# Altium PCB USB转CAN.PcbDoc
Units mm, origin at the board's own origin, x right, y up, seen from the top; angles counter-clockwise.
Board outline 52.5 x 25.53 mm, 2 copper layers (Top Layer, Bottom Layer); 32 components, 35 nets, 173 pads, 22 vias.
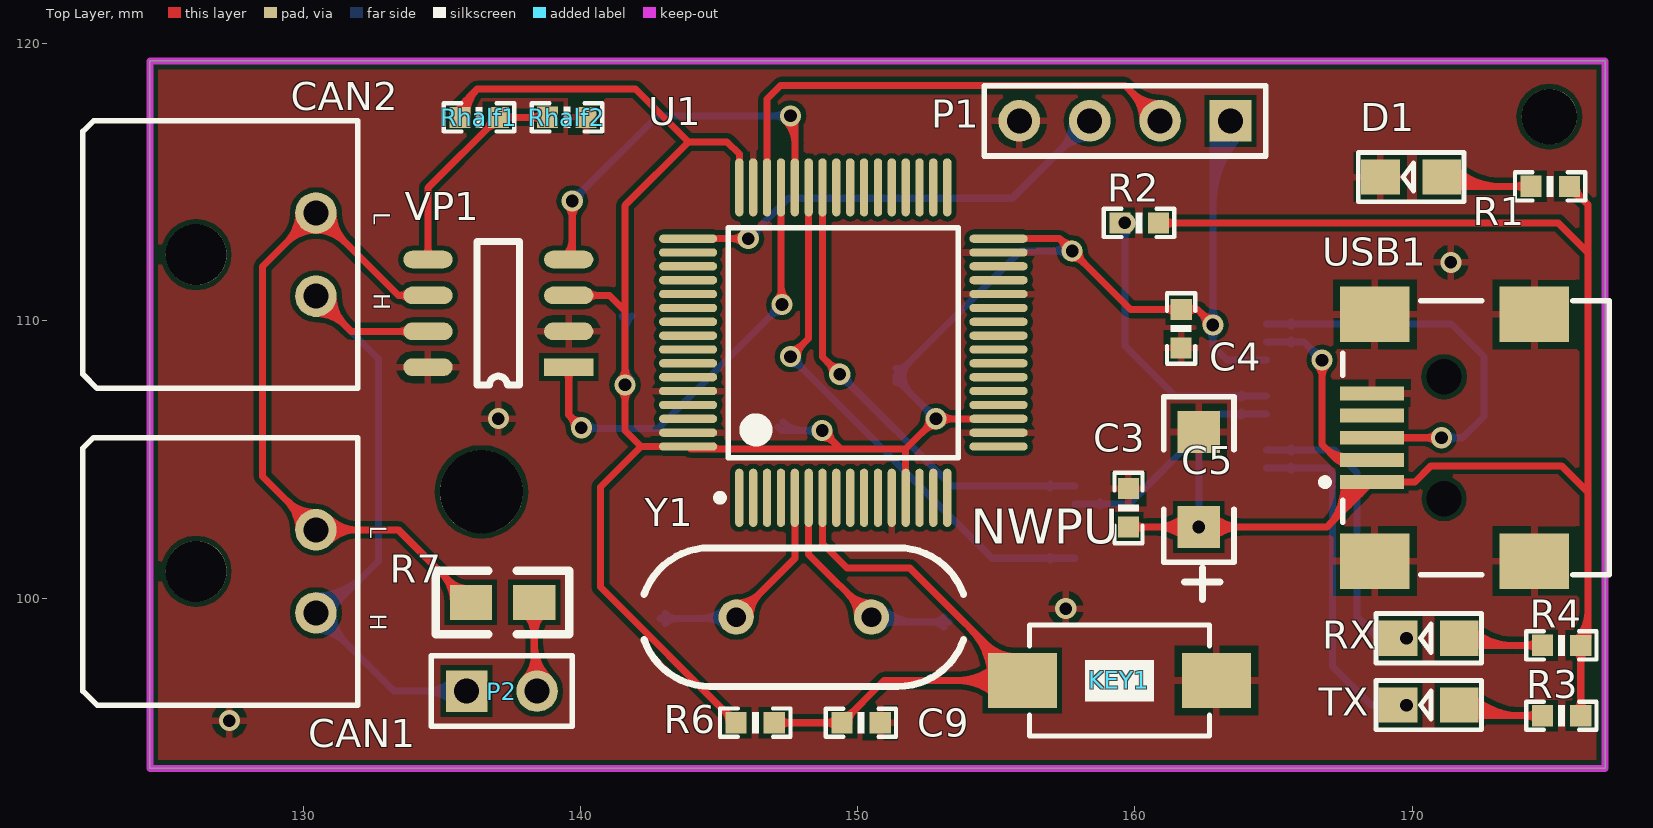
[diagram p0: Top Layer view]
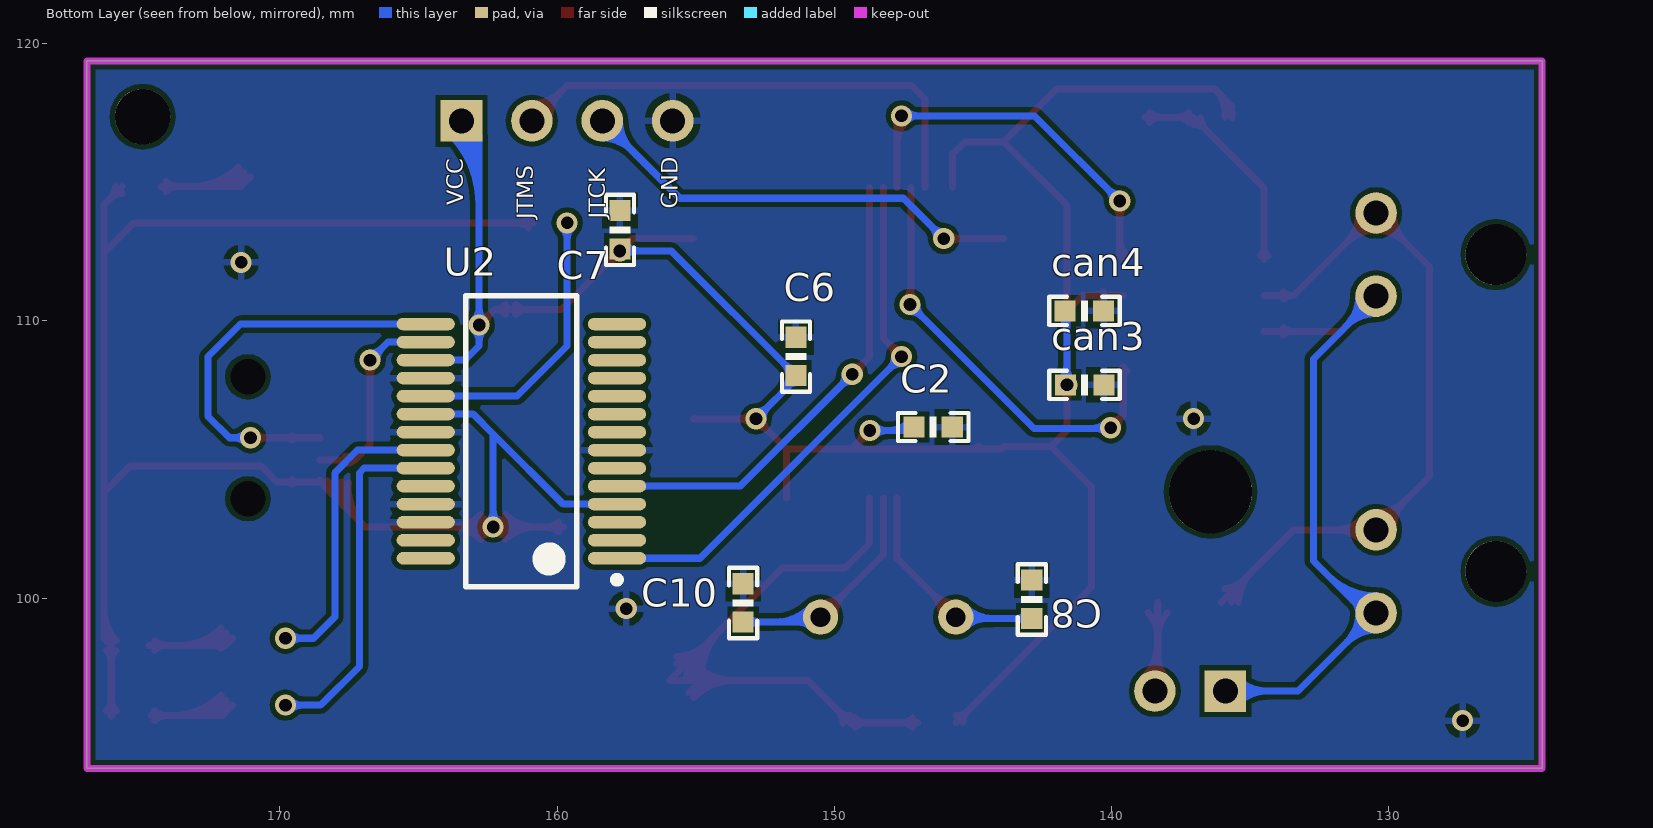
[diagram p1: Bottom Layer view, seen from below]

## Layer stack, top to bottom
Top Solder: solder mask 0.0102, Solder Resist, Dk 3.5
Top Layer: signal copper 0.0356
Dielectric 1: dielectric 0.32, FR-4, Dk 4.8
Bottom Layer: signal copper 0.0356
Bottom Solder: solder mask 0.0102, Solder Resist, Dk 3.5

## Board outline
124.46,93.853 176.962,93.853 176.962,119.38 124.46,119.38

## Design rules (kind name [scope] priority, off if disabled: settings)
Clearance [All] p1: gap=0.178
HoleSize [All] p1: absolutevalues=TRUE maxlimit=25.4 minlimit=0.025 maxpercent=80.000 minpercent=20.000
MinimumSolderMaskSliver [All] p1: minsoldermaskwidth=0
PolygonConnect [All] p1: connectstyle=Relief reliefconductorwidth=0.254 reliefentries=4 polygonreliefangle="90 Angle" airgapwidth=0.254
RoutingVias [All] p1: holewidth=0.711 width=1.27 viastyle="Through Hole" minholewidth=0.711 minwidth=1.27 maxholewidth=0.711 maxwidth=1.27
SilkToSilkClearance [All] p1: silktosilkclearance=0
SilkToSolderMaskClearance [IsPad] p1: minsilkscreentomaskgap=0 clearancetoexposedcopper=TRUE
SolderMaskExpansion [All] p1: expansion=0.102
Width [All] p1: maxlimit=0.254 minlimit=0.254 preferedwidth=0.254
25 further rules are at their usual default settings.

## Components (designator, comment, footprint, x,y, rotation, side; value= is the part's Value field where it differs from the comment)
C2 "104" 0603P 146.431,106.172 r0 bottom
C3 "104" 0603P 159.766,103.251 r90 top
C4 "104" 0603P 161.671,109.728 r270 top
C5 "4.7uF" 1206 162.306,102.565 r90 top
C6 "104" 0603P 151.384,108.712 r90 bottom
C7 "104" 0603P 157.734,113.284 r90 bottom
C8 "22p" 0603P 142.875,99.949 r90 bottom
C9 "104" 0603P 150.114,95.504 r0 top
C10 "22p" 0603P 153.289,99.822 r90 bottom
CAN1 "2针端子" CAN 126.111,100.965 r180 top
CAN2 "2针端子" CAN 126.111,112.395 r180 top
can3 "10uF" 0603p 140.97,107.696 r180 bottom
can4 "104" 0603p 140.97,110.363 r0 bottom
D1 "LED2" SMDLED 171.069,115.189 r180 top
KEY1 "KEY2" SW-PB 159.385,97.028 r270 top
P1 "Header 4" HDR1X4 163.449,117.221 r180 top
P2 "Header 2" HDR1X2 135.89,96.647 r0 top
R1 "Res2" 0603P 174.981,114.859 r0 top
R2 "Res2" 0603P 160.147,113.538 r0 top
R3 "Res2" 0603P 175.387,95.758 r0 top
R4 "Res2" 0603P 175.387,98.298 r0 top
R6 "10kΩ" 0603P 146.304,95.504 r180 top
R7 "120" 0805 136.042,99.847 r0 top
Rhalf1 "1K_1k" 0603p 136.334,117.346 r0 top
Rhalf2 "1K" 0603p 139.51,117.346 r180 top
RX "LED2" SMDLED 171.704,98.552 r180 top (schematic designator D3)
TX "LED2" SMDLED 171.704,96.139 r180 top (schematic designator D2)
U1 "STM32F103RBT6" TQFP-64 145.415,105.156 r90 top
U2 "FT232RL" SSOP-28 161.29,105.664 r0 bottom
USB1 "USB" USB 168.656,110.236 r0 top
VP1 "VP230" VP230 139.573,108.331 r180 top
Y1 "8MHz" XTAL_US 150.495,99.314 r180 top

## Footprints (in the part's own frame and the unit in brackets; to place one, negate y for a bottom-side part, rotate by r counter-clockwise, add the part's x,y. Pads: shape width x height; smd on the part's side, far side on the other; paste and mask are expansions set on the pad)
0603P [mil]
  rect 30x30 smd: 1(-27,0) 2(27.5,-0.06)
  silkscreen extent -50,-20 50,20
0603p [mil]
  rect 30x30 smd: 1(-27,0) 2(27.5,-0.06)
  silkscreen extent -50,-20 50,20
0805 [mil]
  rect 60x50 smd: 1(0,-0.06) 2(90,-0.06)
  silkscreen extent -50,-45 140,45
1206 [mil]
  rect 60x60 smd: 1(0,0) 2(135,0)
  silkscreen extent -50,-50 185,50
CAN [mm]
  round 1.5 hole 0.9: 1(-4.342,1.5) 2(-4.342,-1.5)
  round 2.2 hole 2.2: 3(-0.022,0)
  silkscreen extent -5.84,-4.83 4.06,4.83
HDR1X2 [mm] "Connector; Header; 2 Position"
  rect 1.5x1.5 hole 0.9: 1(0,0)
  round 1.5 hole 0.9: 2(2.54,0)
  silkscreen extent -1.27,-1.27 3.81,1.27
HDR1X4 [mm] "Connector; Header; 4 Position"
  rect 1.5x1.5 hole 0.9: 1(0,0)
  round 1.5 hole 0.9: 2(2.54,0) 3(5.08,0) 4(7.62,0)
  silkscreen extent -1.27,-1.27 8.89,1.27
SMDLED [mm]
  rect 1.4x1.27 smd: 1(0.001,-0.002) 2(2.211,-0.002)
  silkscreen extent -0.8,-0.89 3.01,0.89
SSOP-28 [mm] "FT232"
  oval 2.1x0.45 smd: 1(-3.45,4.225) 2(-3.45,3.575) 3(-3.45,2.925) 4(-3.45,2.275) 5(-3.45,1.625) 6(-3.45,0.975) 7(-3.45,0.325) 8(-3.45,-0.325) 9(-3.45,-0.975) 10(-3.45,-1.625) 11(-3.45,-2.275) 12(-3.45,-2.925) 13(-3.45,-3.575) 14(-3.45,-4.225) 15(3.45,-4.225) 16(3.45,-3.575) 17(3.45,-2.925) 18(3.45,-2.275) 19(3.45,-1.625) 20(3.45,-0.975) 21(3.45,-0.325) 22(3.45,0.325) 23(3.45,0.975) 24(3.45,1.625) 25(3.45,2.275) 26(3.45,2.925) 27(3.45,3.575) 28(3.45,4.225)
  silkscreen extent -3.57,-5.25 2,5.25, body extent -2.8,-5.25 2.8,5.25, height 2
SW-PB [mm]
  rect 2x2.5 smd: 1(0,3.556) 2(0,-3.444)
  silkscreen extent -2,-3.19 2,3.31, body extent -2.03,-3.18 2.03,3.3, height 1.2
TQFP-64 [mm]
  oval 2.1x0.3 smd: 1(-1.536,-0.314) 2(-1.536,-0.814) 3(-1.536,-1.314) 4(-1.536,-1.814) 5(-1.536,-2.314) 6(-1.536,-2.814) 7(-1.536,-3.314) 8(-1.536,-3.814) 9(-1.536,-4.314) 10(-1.536,-4.814) 11(-1.536,-5.314) 12(-1.536,-5.814) 13(-1.536,-6.314) 14(-1.536,-6.814) 15(-1.536,-7.314) 16(-1.536,-7.814) 33(9.664,-7.814) 34(9.664,-7.314) 35(9.664,-6.814) 36(9.664,-6.314) 37(9.664,-5.814) 38(9.664,-5.314) 39(9.664,-4.814) 40(9.664,-4.314) 41(9.664,-3.814) 42(9.664,-3.314) 43(9.664,-2.814) 44(9.664,-2.314) 45(9.664,-1.814) 46(9.664,-1.314) 47(9.664,-0.814) 48(9.664,-0.314)
  oval 0.3x2.1 smd: 17(0.314,-9.664) 18(0.814,-9.664) 19(1.314,-9.664) 20(1.814,-9.664) 21(2.314,-9.664) 22(2.814,-9.664) 23(3.314,-9.664) 24(3.814,-9.664) 25(4.314,-9.664) 26(4.814,-9.664) 27(5.314,-9.664) 28(5.814,-9.664) 29(6.314,-9.664) 30(6.814,-9.664) 31(7.314,-9.664) 32(7.814,-9.664) 49(7.814,1.536) 50(7.314,1.536) 51(6.814,1.536) 52(6.314,1.536) 53(5.814,1.536) 54(5.314,1.536) 55(4.814,1.536) 56(4.314,1.536) 57(3.814,1.536) 58(3.314,1.536) 59(2.814,1.536) 60(2.314,1.536) 61(1.814,1.536) 62(1.314,1.536) 63(0.814,1.536) 64(0.314,1.536)
  silkscreen extent -1.66,-8.21 8.21,0.51, body extent -0.94,-9.06 9.06,0.94, height 1.2
USB [mm]
  rect 2.3x0.5 smd: 1(-0.1,-6.05) 2(-0.1,-5.25) 3(-0.1,-4.45) 4(-0.1,-3.65) 5(-0.1,-2.85)
  rect 2.5x2 smd: 6(0,0) 7(5.754,0) 8(0,-8.9) 9(5.754,-8.9)
  round 0.6 hole 1.27 unplated: MH1(2.5,-2.25) MH2(2.5,-6.65)
  silkscreen extent -1.92,-9.4 8.45,0.5
VP230 [mil]
  rect 70x25 smd: 1(0,0)
  oval 70x25 smd: 2(0,-51) 3(0,-102) 4(0,-153) 5(200,-153) 6(200,-102) 7(200,-51) 8(200,0)
  silkscreen extent 70,-178 130,26
XTAL_US [mil]
  round 50 hole 28: 1(0,0) 2(192.13,0)
  silkscreen extent -131,-98 323,98

## Part data
C2 C3 C4 C6 C7 C9 can4: library part CAP_WYN
C5 can3: library part CAP_POL_WYN
C8 C10: library part C
D1 RX TX: "Typical RED, GREEN, YELLOW, AMBER GaAs LED"
KEY1: library part KEY
P1: "Header, 4-Pin"
P2: "Header, 2-Pin"
R1 R2 R3 R4: "Resistor"
R6 Rhalf1 Rhalf2: library part RES_WYN
R7: library part R
U1: library part STM32F103RDT6
Y1: library part XTAL, "Crystal Oscillator"

## Free pads (board coordinates)
  round 3 hole 3: 0(136.423,103.835)
  round 2 hole 2: 0(174.955,117.373)

## Via types
v1: diameter 0.762, hole 0.457, Top Layer to Bottom Layer, 22 vias

## Nets (pads, with @x,y where several pads share a name; then routed paths per layer and width w, separated by ;. In a path a pad name is that pad's centre, name@x,y a point inside that pad or via, vN(x,y) a via of type N, cw(c..) or ccw(c..) an arc to the next point about the centre after c; other vN are vias at no path point)
CAN_RX: U1.44 VP1.4 | length 18.9
  Top Layer w0.254: VP1.4@139.438,112.352 ccw(c138.806,112.984) 139.7,112.984 ; v1@139.52,114.146 cw(c139.087,113.712) 139.7,113.712 cw(c140.313,113.712) v1@139.88,114.146 ; VP1.4 139.7,112.344 v1(139.7,114.325) ; v1@147.394,117.219 cw(c146.587,116.411) 147.729,116.411 ; U1.44 147.729,117.244 v1(147.574,117.399) cw(c147.2,117.025) 147.729,117.025
  Bottom Layer w0.254: v1(139.7,114.325) 142.773,117.399 v1(147.574,117.399) ; v1@139.7,114.579 ccw(c139.7,115.193) 140.134,114.759 ccw(c140.567,114.325) v1@139.954,114.325 ; v1@147.394,117.219 ccw(c146.961,116.786) 146.961,117.399 ccw(c146.961,118.012) v1@147.394,117.578
CAN_TX: U1.45 VP1.1 | length 20.2
  Top Layer w0.254: VP1.1@139.438,108.196 cw(c139.113,107.871) 139.573,107.871 cw(c140.033,107.871) VP1.1@139.708,108.196 ; VP1.1 139.573,106.604 v1(140.03,106.147) ; v1@139.776,106.147 ccw(c139.163,106.147) 139.597,106.58 ccw(c140.03,107.014) v1@140.03,106.401 ; v1@147.09,110.771 ccw(c146.753,111.108) 147.229,111.108 ; v1@147.229,110.632 U1.45 ; 147.229,111.302 ccw(c147.979,111.302) v1@147.449,110.771
  Bottom Layer w0.254: v1@140.03,106.121 142.799,106.121 v1(147.269,110.592) ; v1@140.21,105.967 cw(c140.582,105.595) 140.582,106.121 ; v1@140.21,106.326 ccw(c140.705,106.821) 140.705,106.121 ; v1@147.015,110.592 cw(c146.402,110.592) 146.836,110.158 cw(c147.269,109.724) v1@147.269,110.338
GND: C2.1 C3.2 C4.2 C5.2 C6.2 C7.2 C8.2 C9.2 C10.2 can3.2 can4.1 D1.2 KEY1.1 P1.4 Rhalf2.1 U1.12 U1.18 U1.28 U1.31 U1.47 U1.60 U1.63 U2.7 U2.18 U2.21 U2.25 U2.26 USB1.5 USB1.6 USB1.7 USB1.8 USB1.9 VP1.2 VP1.8
  other v1: 127.33,95.58 157.505,99.619 137.033,106.477 171.399,112.116
JTDI: U1.50
JTDO: U1.55
JTRST: U1.56
NetCAN1_1: CAN1.1 CAN2.1 P2.1 VP1.7 | length 45.2
  Top Layer w0.254: CAN2.1@130.453,110.272 cw(c130.453,108.768) 131.517,109.831 cw(c132.58,110.895) CAN2.1@131.076,110.895 ; CAN2.1@130.453,110.526 cw(c130.453,109.635) 131.083,110.265 cw(c131.713,110.895) CAN2.1@130.822,110.895 ; CAN2.1 131.722,109.626 VP1.7 ; VP1.7@133.787,109.492 ccw(c133.462,109.166) 133.462,109.626 ccw(c133.462,110.086) VP1.7@133.787,109.761
  Bottom Layer w0.254: CAN1.1@130.453,98.842 cw(c130.453,97.338) 131.517,98.401 cw(c132.58,99.465) 131.076,99.465 cw(c131.66,99.465) 131.247,99.878 ; CAN1.1@130.453,99.096 cw(c130.453,98.205) 131.083,98.835 cw(c131.713,99.465) CAN1.1@130.822,99.465 ; CAN1.1@130.453,99.58 ccw(c130.453,100.777) 131.3,99.931 ; CAN1.1@130.453,99.834 ccw(c130.453,101.645) 131.733,100.364 ; CAN1.1@130.453,100.088 ccw(c130.453,102.512) 132.167,100.798 ; CAN2.1@130.453,110.272 cw(c130.453,108.768) 131.517,109.831 cw(c132.58,110.895) CAN2.1@131.076,110.895 ; CAN2.1@130.453,110.526 cw(c130.453,109.635) 131.083,110.265 cw(c131.713,110.895) CAN2.1@130.822,110.895 ; CAN2.1 132.715,108.633 132.715,101.346 130.834,99.465 CAN1.1 133.271,96.647 P2.1 ; P2.1@135.449,96.206 ccw(c134.386,95.143) 134.386,96.647 ccw(c134.386,98.151) P2.1@135.449,97.088 ; P2.1@135.629,96.386 ccw(c134.999,95.756) 134.999,96.647 ccw(c134.999,97.538) P2.1@135.629,96.908
NetCAN1_2: CAN1.2 CAN2.2 R7.1 VP1.6 | length 43.4
  Top Layer w0.254: CAN1.2@129.83,102.465 ccw(c128.326,102.465) 129.389,103.529 ccw(c130.453,104.592) CAN1.2@130.453,103.088 ; CAN2.2@129.83,113.895 cw(c128.326,113.895) 129.389,112.831 cw(c130.453,111.768) 130.453,113.272 cw(c130.453,111.768) 131.517,112.831 cw(c132.58,113.895) CAN2.2@131.076,113.895 ; CAN1.2@130.084,102.465 ccw(c129.193,102.465) 129.823,103.095 ccw(c130.453,103.725) CAN1.2@130.453,102.834 ; CAN2.2@130.084,113.895 cw(c129.193,113.895) 129.823,113.265 cw(c130.453,112.635) 130.453,113.526 cw(c130.453,112.635) 131.083,113.265 cw(c131.713,113.895) CAN2.2@130.822,113.895 ; CAN1.2@130.714,102.204 cw(c131.344,101.574) 131.344,102.465 cw(c131.344,103.356) CAN1.2@130.714,102.726 ; CAN1.2@130.894,102.024 cw(c131.957,100.961) 131.957,102.465 cw(c131.957,103.969) CAN1.2@130.894,102.906 ; VP1.6@133.787,110.787 ccw(c133.462,110.462) 133.462,110.922 ccw(c133.462,111.382) VP1.6@133.787,111.057 ; VP1.6 133.426,110.922 CAN2.2 128.524,111.966 128.524,104.394 CAN1.2 133.423,102.465 R7.1 ; 134.958,100.93 cw(c133.874,99.846) R7.1@135.407,99.846 ; 135.265,100.623 ccw(c135.915,101.274) R7.1@135.915,100.354 ; 135.392,100.496 cw(c134.742,99.846) R7.1@135.661,99.846
NetD1_1: D1.1 R1.1 | length 8.4
  Top Layer w0.254: D1.1 171.4,114.859 R1.1 ; D1.1@171.133,115.191 ccw(c171.934,115.992) 171.934,114.859 ; D1.1@171.313,115.37 ccw(c172.547,116.605) 172.547,114.859 ; D1.1@171.492,115.55 ccw(c173.161,117.218) 173.161,114.859 ; R1.1@174.115,114.679 ccw(c173.682,114.246) 173.682,114.859 ccw(c173.682,115.472) R1.1@174.115,115.038
NetD2_1: R3.1 TX.1 | length 8.6
  Top Layer w0.254: TX.1 172.086,95.758 R3.1@174.65,95.758 ; TX.1@171.768,96.141 ccw(c172.692,97.064) 172.692,95.758 ; TX.1@171.948,96.32 ccw(c173.305,97.678) 173.305,95.758 ; TX.1@172.127,96.5 ccw(c173.918,98.291) 173.918,95.758 ; R3.1@174.522,95.578 ccw(c174.088,95.145) 174.088,95.758 ccw(c174.088,96.371) R3.1@174.522,95.938
NetD2_2: TX.2 U2.23 | length 14
  Bottom Layer w0.254: U2.23 166.964,104.689 167.132,104.521 167.132,97.536 168.529,96.139 v1(169.799,96.139) ; U2.23@165.634,104.62 cw(c165.802,104.452) 165.802,104.689 cw(c165.802,104.926) U2.23@165.634,104.758 ; v1@169.619,95.959 ccw(c169.186,95.526) 169.186,96.139 ccw(c169.186,96.752) v1@169.619,96.319
NetD3_1: R4.1 RX.1 | length 7.9
  Top Layer w0.254: RX.1 171.959,98.298 R4.1@174.727,98.298 ; RX.1@171.768,98.554 ccw(c172.385,99.171) RX.1@172.385,98.298 ; RX.1@171.948,98.733 ccw(c172.999,99.784) 172.999,98.298 ; RX.1@172.127,98.194 cw(c172.377,97.944) RX.1@172.377,98.298 ; RX.1@172.127,98.913 ccw(c173.612,100.397) 173.612,98.298 ; R4.1@174.522,98.118 ccw(c174.088,97.685) 174.088,98.298 ccw(c174.088,98.911) R4.1@174.522,98.478
NetD3_2: RX.2 U2.22 | length 12.3
  Bottom Layer w0.254: U2.22 167.203,105.339 168.021,104.521 168.021,99.314 168.783,98.552 v1(169.799,98.552) ; U2.22@165.634,105.27 cw(c165.802,105.102) 165.802,105.339 cw(c165.802,105.576) U2.22@165.634,105.408 ; v1@169.619,98.372 ccw(c169.186,97.939) 169.186,98.552 ccw(c169.186,99.165) v1@169.619,98.732
NetP2_2: P2.2 R7.2 | length 8.6
  Top Layer w0.254: R7.2@137.969,99.487 cw(c137.102,98.619) 138.328,98.619 cw(c139.555,98.619) R7.2@138.688,99.487 ; P2.2@137.989,97.088 ccw(c137.171,97.906) 138.328,97.906 ; 138.328,97.783 ccw(c139.566,97.783) P2.2@138.691,96.908 ; 138.328,98.396 ccw(c140.179,98.396) P2.2@138.871,97.088 ; R7.2 138.328,96.749 P2.2 P2.2@138.493,96.71
NetR2_1: R2.1 U2.19 | length 11.6
  Bottom Layer w0.254: v1@159.459,113.358 cw(c159.026,112.925) 159.639,112.925 cw(c160.252,112.925) v1@159.819,113.358 ; v1(159.639,113.538) 159.639,109.093 161.443,107.289 U2.19 ; U2.19@163.846,107.22 ccw(c163.678,107.052) 163.678,107.289 ccw(c163.678,107.526) U2.19@163.846,107.358
NetRhalf1_2: Rhalf1.2 Rhalf2.2 VP1.5 | length 11.6
  Top Layer w0.254: VP1.5@134.358,112.352 ccw(c134.033,112.677) 134.493,112.677 ccw(c134.953,112.677) VP1.5@134.628,112.352 ; VP1.5 134.493,114.805 Rhalf1.2 Rhalf2.2@138.808,117.345 ; Rhalf1.2@136.779,117.345 cw(c136.166,117.345) 136.599,116.911 cw(c137.033,116.478) Rhalf1.2@137.033,117.091 ; Rhalf1.2@137.213,117.165 cw(c137.646,116.732) 137.646,117.345 cw(c137.646,117.958) Rhalf1.2@137.213,117.524 ; 138.19,117.345 ccw(c138.19,117.969) Rhalf2.2@138.631,117.528 ; 138.206,117.345 cw(c138.206,116.743) Rhalf2.2@138.631,117.168
OSC_IN: C8.1 U1.5 Y1.2 | length 13.4
  Top Layer w0.254: Y1.2 147.729,101.428 U1.5 ; Y1.2@145.615,99.822 ccw(c145.615,101.048) 146.482,100.181 ccw(c147.349,99.314) Y1.2@146.123,99.314
  Bottom Layer w0.254: C8.1 145.564,99.263 Y1.2 ; C8.1@143.055,99.084 cw(c143.488,98.65) 143.488,99.263 cw(c143.488,99.876) C8.1@143.055,99.443 ; 144.266,99.263 ccw(c144.266,100.663) Y1.2@145.256,99.673 ; 144.511,99.263 cw(c144.511,98.21) Y1.2@145.256,98.955 ; 144.879,99.263 ccw(c144.879,100.05) Y1.2@145.435,99.494
OSC_OUT: C10.1 U1.6 Y1.1 | length 13.9
  Top Layer w0.254: U1.6 148.229,101.58 Y1.1 ; Y1.1@149.987,99.314 ccw(c148.761,99.314) 149.628,100.181 ccw(c150.495,101.048) Y1.1@150.495,99.822
  Bottom Layer w0.254: Y1.1 150.673,99.136 C10.1 ; Y1.1@150.675,99.494 ccw(c151.537,100.356) 151.537,99.136 ; Y1.1@150.854,98.955 cw(c151.292,98.517) 151.292,99.136 ; Y1.1@150.854,99.673 ccw(c152.151,100.97) 152.151,99.136 ; C10.1@153.109,98.957 ccw(c152.676,98.523) 152.676,99.136 ccw(c152.676,99.749) C10.1@153.109,99.316
PB1: U1.27
PB2: U1.26
PB12: U1.33
PB13: U1.34
RESET: C9.1 KEY1.2 R6.1 U1.7 | length 35.9
  Top Layer w0.254: R6.1 C9.1 150.952,97.028 KEY1.2 151.877,101.092 149.606,101.092 148.729,101.969 U1.7 ; R6.1@147.169,95.324 cw(c147.603,94.891) 147.603,95.504 cw(c147.603,96.117) R6.1@147.169,95.684 ; C9.1@149.249,95.324 ccw(c148.815,94.891) 148.815,95.504 ccw(c148.815,96.117) C9.1@149.249,95.684 ; C9.1@149.428,95.758 ccw(c149.428,96.371) 149.862,95.938 ccw(c150.295,95.504) C9.1@149.682,95.504 ; 154.024,98.945 cw(c152.107,97.028) KEY1.2@154.818,97.028 ; 154.458,98.511 cw(c152.974,97.028) KEY1.2@155.072,97.028 ; 154.627,98.342 ccw(c155.691,99.405) KEY1.2@155.691,97.901 ; 154.891,98.078 cw(c153.841,97.028) KEY1.2@155.326,97.028 ; KEY1.2@155.061,97.908 ccw(c155.691,98.538) KEY1.2@155.691,97.647 ; KEY1.2@155.074,96.411 ccw(c153.583,94.92) 153.583,97.028 ccw(c153.583,99.136) KEY1.2@155.074,97.645 ; KEY1.2@155.253,96.59 ccw(c154.197,95.534) 154.197,97.028 ccw(c154.197,98.522) KEY1.2@155.253,97.466
SWCLK: P1.3 U1.49 | length 21.9
  Top Layer w0.254: U1.49 v1(146.05,112.97) ; v1@145.87,112.79 ccw(c145.437,112.357) 145.437,112.97 ccw(c145.437,113.583) v1@145.87,113.15
  Bottom Layer w0.254: v1(146.05,112.97) 147.507,114.427 155.575,114.427 P1.3 ; v1@146.05,113.224 ccw(c146.05,113.837) 146.484,113.404 ccw(c146.917,112.97) v1@146.304,112.97 ; P1.3@157.746,117.221 cw(c156.242,117.221) 157.305,116.157 cw(c158.369,115.094) P1.3@158.369,116.598 ; P1.3@158,117.221 cw(c157.109,117.221) 157.739,116.591 cw(c158.369,115.961) P1.3@158.369,116.852
SWDIO: P1.2 U1.46 | length 21.9
  Top Layer w0.254: U1.46 146.729,118.002 147.218,118.491 159.639,118.491 P1.2 ; P1.2@160.286,117.221 ccw(c158.782,117.221) 159.845,118.285 ccw(c160.909,119.348) P1.2@160.909,117.844 ; P1.2@160.54,117.221 ccw(c159.649,117.221) 160.279,117.851 ccw(c160.909,118.481) P1.2@160.909,117.59
U1_RX: U1.43 U2.1 | length 22
  Top Layer w0.254: v1(147.574,108.712) 148.229,109.367 U1.43 ; v1@147.574,108.966 ccw(c147.574,109.579) 148.008,109.146 ccw(c148.441,108.712) v1@147.828,108.712
  Bottom Layer w0.254: v1@147.574,108.458 cw(c147.574,107.845) 148.008,108.278 cw(c148.441,108.712) v1@147.828,108.712 ; v1(147.574,108.712) 154.847,101.439 U2.1 ; U2.1@156.946,101.37 ccw(c156.778,101.202) 156.778,101.439 ccw(c156.778,101.676) U2.1@156.946,101.508
U1_TX: U1.42 U2.5 | length 19.5
  Top Layer w0.254: U1.42 148.729,108.7 v1(149.352,108.077) ; v1@149.098,108.077 ccw(c148.485,108.077) 148.918,108.511 ccw(c149.352,108.944) v1@149.352,108.331
  Bottom Layer w0.254: v1@149.352,107.823 cw(c149.352,107.21) 149.786,107.643 cw(c150.219,108.077) v1@149.606,108.077 ; v1(149.352,108.077) 153.39,104.039 U2.5 ; U2.5@156.946,103.97 ccw(c156.778,103.802) 156.778,104.039 ccw(c156.778,104.276) U2.5@156.946,104.108
U2_RX: U1.17
U2_TX: U1.16
U3_RX: U1.30
U3_TX: U1.29
USBDM: U2.16 USB1.2 | length 11.5
  Top Layer w0.254: v1@166.571,108.405 cw(c166.138,107.972) 166.751,107.972 cw(c167.364,107.972) v1@166.931,108.405 ; v1(166.751,108.585) 166.751,105.537 167.302,104.986 USB1.2 ; 166.842,105.446 ccw(c167.656,106.26) USB1.2@167.656,105.109 ; 167.275,105.013 ccw(c167.656,105.393) USB1.2@167.656,104.855 ; USB1.2@167.569,104.899 ccw(c167.359,104.689) 167.359,104.986 ccw(c167.359,105.283) USB1.2@167.569,105.073
  Bottom Layer w0.254: U2.16 166.097,109.239 v1(166.751,108.585) ; U2.16@165.634,109.17 cw(c165.802,109.002) 165.802,109.239 cw(c165.802,109.476) U2.16@165.634,109.308 ; v1@166.497,108.585 ccw(c165.884,108.585) 166.317,109.019 ccw(c166.751,109.452) v1@166.751,108.839
USBDP: U2.15 USB1.3 | length 17.6
  Top Layer w0.254: USB1.3 v1(171.064,105.786) ; USB1.3@169.543,105.699 cw(c169.753,105.489) 169.753,105.786 cw(c169.753,106.083) USB1.3@169.543,105.873 ; v1@170.884,105.606 ccw(c170.451,105.173) 170.451,105.786 ccw(c170.451,106.399) v1@170.884,105.966
  Bottom Layer w0.254: U2.15 171.416,109.889 172.593,108.712 172.593,106.553 171.826,105.786 v1(171.064,105.786) ; U2.15@165.634,109.82 cw(c165.802,109.652) 165.802,109.889 cw(c165.802,110.126) U2.15@165.634,109.958 ; v1@171.244,105.606 cw(c171.677,105.173) 171.677,105.786 cw(c171.677,106.399) v1@171.244,105.966
VCC3.3: C2.2 C4.1 C6.1 C7.1 can3.1 can4.2 P1.1 R6.2 Rhalf1.1 U1.13 U1.19 U1.32 U1.48 U1.64 U2.17 VP1.3 | length 124.5
  Top Layer w0.254: Rhalf1.1 cw(c136.446,117.408) 135.881,117.974 ; 135.649,117.742 136.271,118.364 ; Rhalf1.1@135.902,117.366 cw(c137.171,117.464) 136.271,118.364 ; VP1.3 141.046,110.922 141.605,110.363 ; VP1.3@140.279,110.787 cw(c140.604,110.462) 140.604,110.922 cw(c140.604,111.382) VP1.3@140.279,111.057 ; v1@141.425,107.516 cw(c140.992,107.083) 141.605,107.083 cw(c142.218,107.083) v1@141.785,107.516 ; v1@141.425,107.876 ccw(c140.992,108.309) 141.605,108.309 ccw(c142.218,108.309) v1@141.785,107.876 ; U1.64@144.795,105.486 ccw(c145.066,105.757) 145.066,105.374 ; R6.2@145.351,95.506 ccw(c144.738,95.506) 145.172,95.939 ccw(c145.606,96.373) R6.2@145.606,95.76 ; R6.2 140.716,100.395 140.716,104.006 142.18,105.47 ; U1.48 145.729,116.018 145.288,116.459 143.891,116.459 ; v1@148.717,105.791 cw(c148.717,105.178) 149.151,105.611 cw(c149.584,106.045) v1@148.971,106.045 ; v1(148.717,106.045) 149.388,105.374 ; U1.13 151.729,105.374 ; v1@152.571,106.47 cw(c151.958,106.47) 152.391,106.036 cw(c152.825,105.603) v1@152.825,106.216 ; v1@153.005,106.29 cw(c153.438,105.857) 153.438,106.47 cw(c153.438,107.083) v1@153.005,106.65 ; U1.19 v1(152.825,106.47) 151.729,105.374 ; U1.32 157.286,112.97 v1(157.734,112.522) 159.842,110.414 C4.1 162.255,110.414 ; v1@157.48,112.522 ccw(c156.867,112.522) 157.3,112.956 ccw(c157.734,113.389) v1@157.734,112.776 ; v1@157.734,112.268 cw(c157.734,111.655) 158.168,112.088 cw(c158.601,112.522) v1@157.988,112.522 ; C4.1@161.491,110.234 ccw(c161.058,109.801) 161.058,110.414 ccw(c161.058,111.027) C4.1@161.491,110.593 ; C4.1@161.857,110.241 cw(c162.255,109.869) 162.255,110.414 ; C4.1@161.857,110.587 ccw(c162.255,110.959) 162.255,110.414 ; v1@162.56,109.855 ccw(c161.947,109.855) 162.38,110.289 ccw(c162.814,110.722) v1@162.814,110.109 ; v1(162.814,109.855) 162.255,110.414 ; 136.271,118.364 141.986,118.364 143.891,116.459 ; 141.605,110.363 v1(141.605,107.696) 141.605,106.045 142.18,105.47 ; 141.605,110.363 141.605,114.173 143.891,116.459 ; 142.18,105.47 U1.64 143.975,105.374 149.388,105.374 ; 149.388,105.374 151.729,105.374
  Bottom Layer w0.254: can3.1@141.425,107.876 ccw(c140.992,108.309) 141.605,108.309 ccw(c142.218,108.309) can3.1@141.785,107.876 ; can3.1@141.476,107.876 ccw(c141.165,108.187) 141.605,108.187 ; can4.2@141.489,110.185 cw(c141.209,109.905) 141.605,109.905 ; v1(141.605,107.696) can4.2@141.605,110.301 ; 141.605,108.432 ccw(c142.392,108.432) can3.1@141.835,107.876 ; 141.605,109.598 cw(c142.435,109.598) can4.2@141.848,110.185 ; C2.2 147.258,106.045 v1(148.717,106.045) ; C2.2@147.309,106.353 ccw(c148.053,107.097) 148.053,106.045 ; v1@148.537,105.865 ccw(c148.104,105.432) 148.104,106.045 ccw(c148.104,106.658) v1@148.537,106.225 ; C6.1@151.384,107.772 cw(c151.384,107.437) C6.1@151.621,107.674 ; C6.1@151.384,108.28 ccw(c151.384,108.893) 151.818,108.46 ccw(c152.251,108.026) 151.638,108.026 ccw(c152.529,108.026) 151.899,107.396 ; v1@152.571,106.47 ccw(c151.958,106.47) 152.391,106.904 ccw(c152.825,107.337) v1@152.825,106.724 ; v1(152.825,106.47) 151.384,107.911 C6.1 155.88,112.522 v1(157.734,112.522) ; 156.937,112.522 ccw(c156.937,113.395) C7.1@157.554,112.778 ; 157.305,112.522 cw(c157.305,112.169) C7.1@157.554,112.419 ; C7.1@157.554,112.342 ccw(c157.121,111.909) 157.121,112.522 ccw(c157.121,113.135) C7.1@157.554,112.702 ; v1@162.634,109.675 cw(c162.201,109.242) 162.814,109.242 cw(c163.427,109.242) v1@162.994,109.675 ; v1@162.634,110.035 ccw(c162.201,110.468) 162.814,110.468 ccw(c163.427,110.468) v1@162.994,110.035 ; 162.814,114.184 cw(c166.486,114.184) P1.1@163.89,116.78 ; 162.814,114.797 cw(c165.873,114.797) P1.1@163.71,116.96 ; 162.814,115.41 cw(c165.26,115.41) P1.1@163.53,117.14 ; 162.814,116.024 cw(c164.646,116.024) P1.1@163.351,117.319 ; P1.1@162.814,116.637 cw(c164.033,116.637) P1.1@163.171,117.499 ; P1.1 162.814,116.586 v1(162.814,109.855) 162.814,109.093 163.318,108.589 U2.17 ; U2.17@163.846,108.52 ccw(c163.678,108.352) 163.678,108.589 ccw(c163.678,108.826) U2.17@163.846,108.658
VCC5: C3.1 C5.1 R1.2 R2.2 R3.2 R4.2 U2.4 U2.20 USB1.1 | length 88.1
  Top Layer w0.254: C3.1 v1(162.306,102.565) 166.935,102.565 ; C3.1@159.946,102.386 cw(c160.379,101.952) 160.379,102.565 cw(c160.379,103.178) C3.1@159.946,102.745 ; R2.2 175.274,113.536 176.339,112.471 ; R2.2@161.025,113.357 cw(c161.459,112.923) 161.459,113.536 cw(c161.459,114.15) R2.2@161.025,113.716 ; C5.1@161.857,102.116 ccw(c160.773,101.032) 160.773,102.565 ccw(c160.773,104.098) C5.1@161.857,103.014 ; C5.1@162.037,102.296 ccw(c161.386,101.645) 161.386,102.565 ccw(c161.386,103.485) C5.1@162.037,102.835 ; C5.1@162.126,102.386 ccw(c161.693,101.952) 161.693,102.565 ccw(c161.693,103.178) C5.1@162.126,102.745 ; C5.1@162.486,102.386 cw(c162.919,101.952) 162.919,102.565 cw(c162.919,103.178) C5.1@162.486,102.745 ; C5.1@162.575,102.296 cw(c163.226,101.645) 163.226,102.565 cw(c163.226,103.485) C5.1@162.575,102.835 ; C5.1@162.755,102.116 cw(c163.839,101.032) 163.839,102.565 cw(c163.839,104.098) C5.1@162.755,103.014 ; 167.327,102.957 ccw(c166.206,104.078) USB1.1@167.787,104.196 ; USB1.1@167.533,104.177 cw(c165.477,104.023) 166.935,102.565 ; 167.718,103.348 ccw(c166.935,104.132) USB1.1@168.04,104.215 ; 168.11,103.74 ccw(c167.663,104.187) USB1.1@168.293,104.234 ; USB1.1@168.502,104.132 ccw(c168.392,104.241) USB1.1@168.546,104.253 ; USB1.1@169.543,104.099 cw(c169.753,103.889) 169.753,104.186 cw(c169.753,104.483) USB1.1@169.543,104.273 ; R1.2@175.679,114.603 cw(c175.679,113.99) 176.113,114.424 cw(c176.546,114.857) R1.2@175.933,114.857 ; R1.2 176.339,114.197 176.339,112.471 ; R3.2@175.906,95.936 ccw(c175.472,96.37) 176.085,96.37 ccw(c176.699,96.37) R3.2@176.265,95.936 ; R4.2@175.906,98.117 cw(c175.472,97.683) 176.085,97.683 cw(c176.699,97.683) R4.2@176.265,98.117 ; R4.2@175.906,98.476 ccw(c174.859,99.523) 176.339,99.523 ; R3.2 R4.2 ; 176.339,98.91 cw(c175.472,98.91) R4.2 ; 166.935,102.565 USB1.1 170.099,104.186 170.688,104.775 175.387,104.775 176.339,103.822 ; R4.2 176.339,98.55 176.339,103.822 ; 176.339,103.822 176.339,112.471
  Bottom Layer w0.254: U2.4 159.777,103.389 162.306,105.918 ; U2.4@158.734,103.32 cw(c158.902,103.152) 158.902,103.389 cw(c158.902,103.626) U2.4@158.734,103.458 ; v1@162.126,102.745 ccw(c161.693,103.178) 162.306,103.178 ccw(c162.919,103.178) v1@162.486,102.745 ; v1(162.306,102.565) 162.306,105.918 ; U2.20@163.846,106.57 ccw(c163.678,106.402) 163.678,106.639 ccw(c163.678,106.876) U2.20@163.846,106.708 ; U2.20 163.027,106.639 162.306,105.918
pads on no net: CAN1.3 CAN2.3 U1.1 U1.2 U1.3 U1.4 U1.8 U1.9 U1.10 U1.11 U1.14 U1.15 U1.20 U1.21 U1.22 U1.23 U1.24 U1.25 U1.35 U1.36 U1.37 U1.38 U1.39 U1.40 U1.41 U1.51 U1.52 U1.53 U1.54 U1.57 U1.58 U1.59 U1.61 U1.62 U2.2 U2.3 U2.6 U2.8 U2.9 U2.10 U2.11 U2.12 U2.13 U2.14 U2.24 U2.27 U2.28 USB1.4 USB1.MH1 USB1.MH2

## Polygon pours and split planes (outlines as drawn)
GND on Top Layer "TopLayer-GND" (solid, remove dead copper, pour order 4): 124.46,119.38 176.962,119.38 176.962,93.853 124.46,93.853
GND on Bottom Layer "BottomLayer-GND" (solid, remove dead copper, pour order 6): 124.46,119.38 176.962,119.38 176.962,93.853 124.46,93.853

## Keep-outs
Keep-Out Layer:
  the board outline again, w0.254

## Silkscreen, mask and mechanical layers (free items; w line width, h text height)
Top Overlay:
  lines w0.254: 161.798,100.584 163.068,100.584 ; 162.433,99.949 162.433,101.092
  text "L" at 132.334,113.919 h1.02 r270
  text "H" at 132.334,110.998 h1.02 r270
  text "L" at 132.207,102.616 h1.02 r270
  text "NWPU" at 154.076,101.956 h1.27
  text "H" at 132.207,99.441 h1.02 r270
Bottom Overlay:
  text "VCC" at 163.195,114.173 h1.02 r270
  text "GND" at 155.448,114.046 h1.02 r270
  text "JTCK" at 158.064,113.69 h1.02 r270
  text "JTMS" at 160.655,113.665 h1.02 r270